# Altium PCB otis_v1.PcbDoc
Units mil, origin at the board's own origin, x right, y up, seen from the top; angles counter-clockwise.
Board outline 1739 x 885 mil, 2 copper layers (Top Layer, Bottom Layer); 13 components, 21 nets, 88 pads, 13 vias.
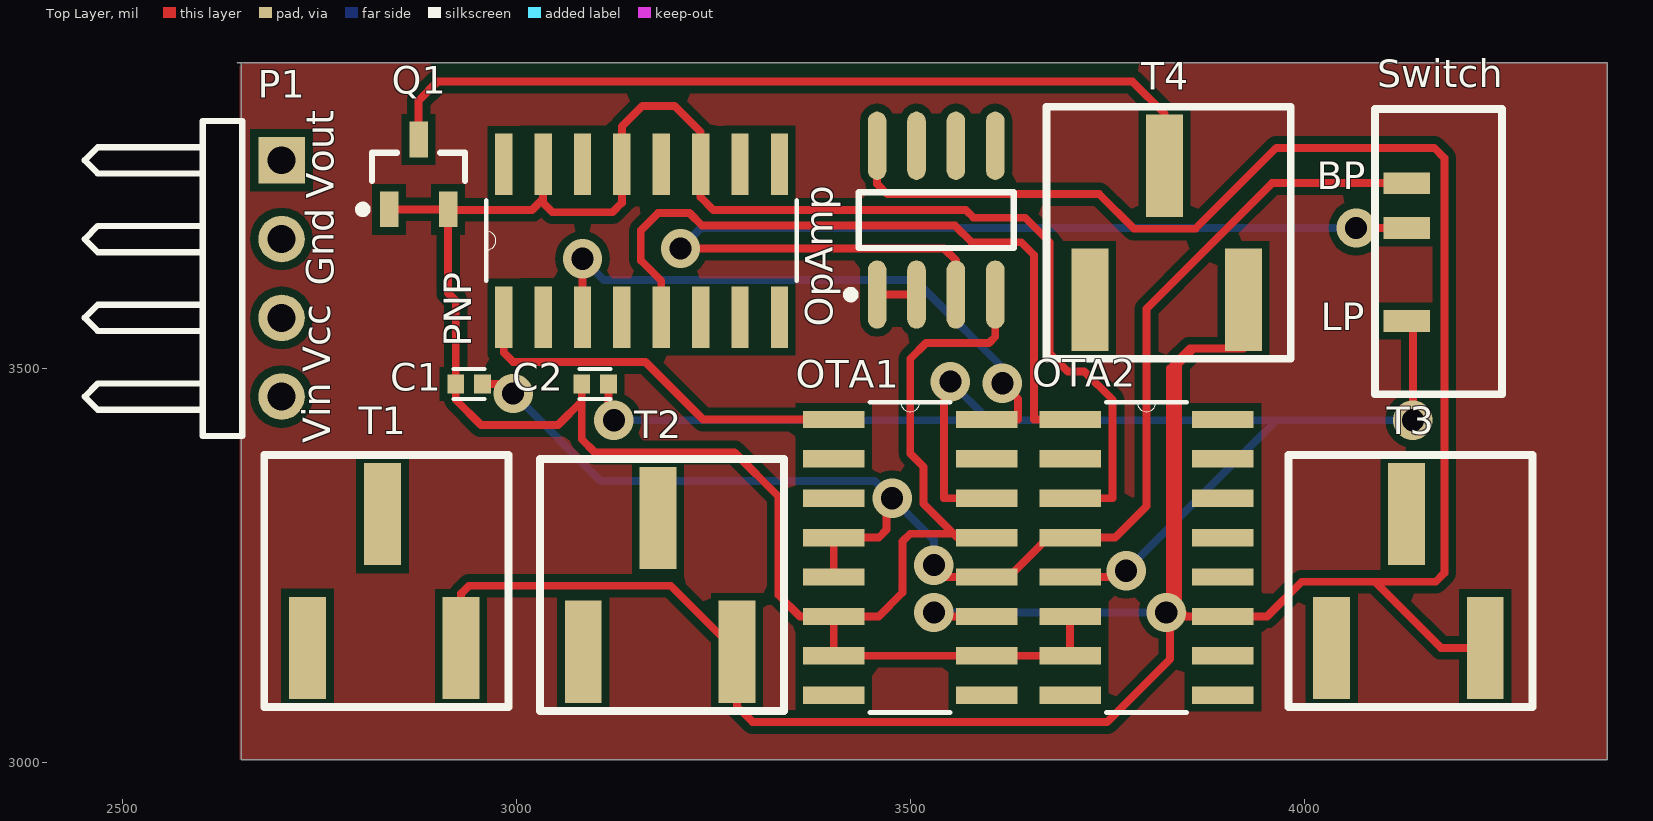
[diagram p0: Top Layer view]
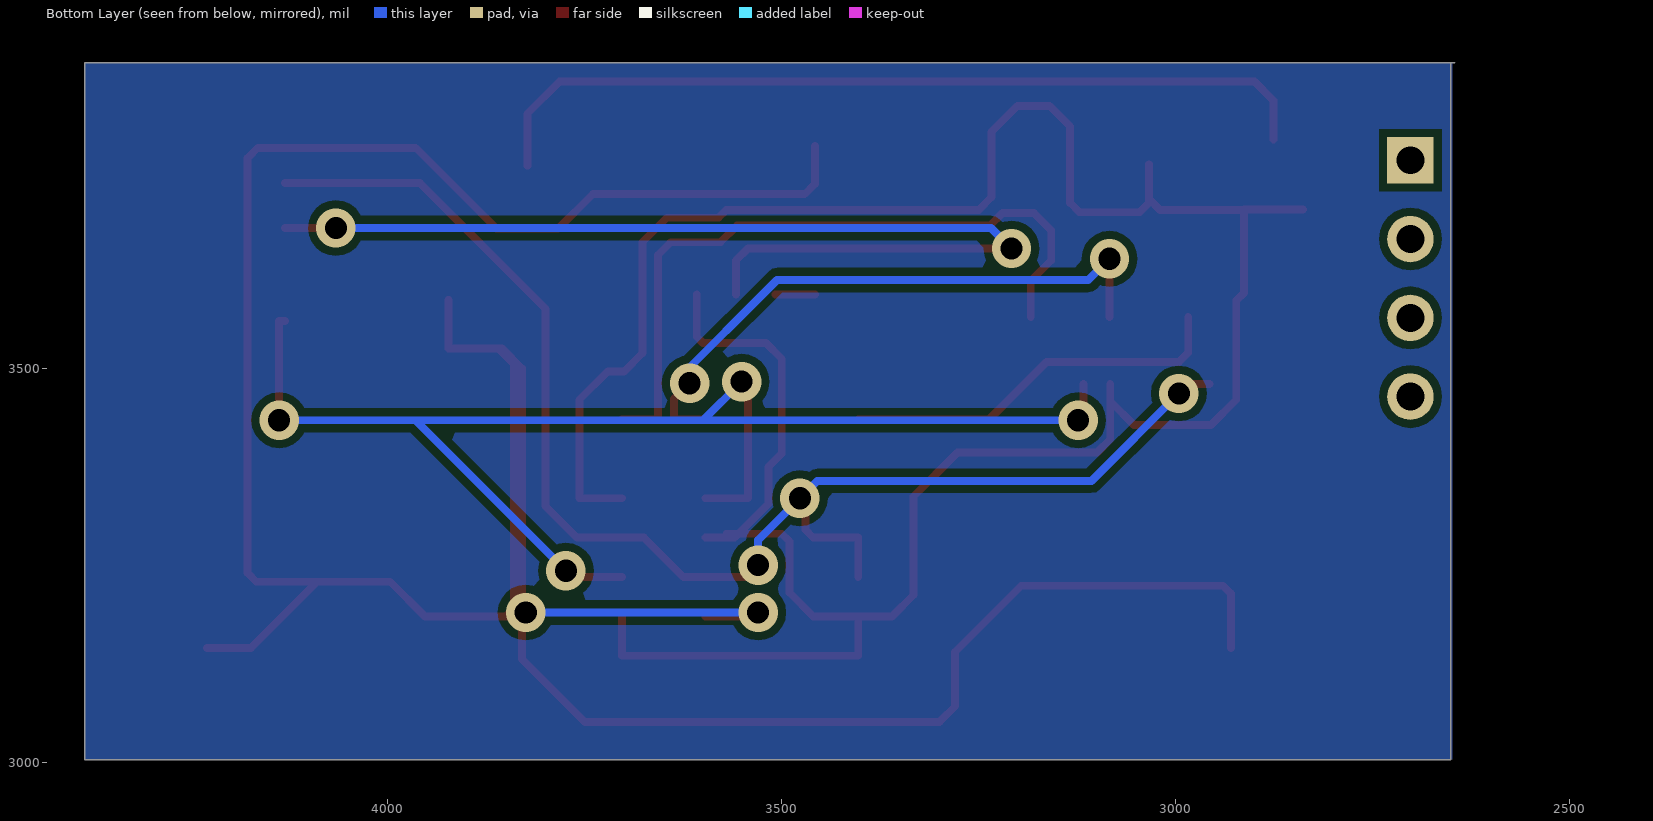
[diagram p1: Bottom Layer view, seen from below]

## Layer stack, top to bottom
Top Solder: solder mask 0.4, Solder Resist, Dk 3.5
Top Layer: signal copper 1.4
Dielectric1: dielectric 12.6, FR-4, Dk 4.8
Bottom Layer: signal copper 1.4
Bottom Solder: solder mask 0.4, Solder Resist, Dk 3.5

## Board outline
2646,3888 4385,3888 4385,3003 2651,3003 2651,3887

## Design rules (kind name [scope] priority, off if disabled: settings)
Clearance [All] p1: gap=10
FabricationTestPointUsage TestPointUsage [All] p1: valid=0 allowmultiple=FALSE
FabricationTestpoint Testpoint [All] p1: side=3 testpointundercomponent=TRUE minsize=40 maxsize=100 preferedsize=60 minholesize=0 maxholesize=40 preferedholesize=32 testpointgrid=1 allowsidetop=TRUE allowsidebottom=TRUE usegrid=TRUE gridtolerance=0.01
PolygonConnect [All] p1: connectstyle=Relief reliefconductorwidth=10 reliefentries=4 polygonreliefangle="90 Angle" airgapwidth=10
RoutingVias [All] p1: holewidth=28 width=50 viastyle="Through Hole" minholewidth=28 minwidth=50 maxholewidth=28 maxwidth=50
SolderMaskExpansion [All] p1: expansion=4
UnpouredPolygon [All] p1: allowunpoured=FALSE
Width [All] p1: maxlimit=15 minlimit=10 preferedwidth=10 minimp=50.000000 maximp=50.000000 favimp=50.000000
27 further rules are at their usual default settings.

## Components (designator, comment, footprint, x,y, rotation, side; value= is the part's Value field where it differs from the comment)
C1 "100pF" _C*CAPC1005X55N_CC0402C100K5GACAUTO_CPrimary_C 2940,3480 r0 top
C2 "100pF" _C*CAPC1005X55N_CC0402C100K5GACAUTO_CPrimary_C 3100,3480 r0 top
OpAmp "LF153D" SO8_N 3533,3688 r90 top (schematic designator U4)
OTA1 "" LM13700LM13700MLM13700LM13700MLM13700PrimaryLM13700 3500,3260 r0 top (schematic designator U1)
OTA2 "" LM13700LM13700MLM13700LM13700MLM13700PrimaryLM13700 3800,3260 r0 top (schematic designator U2)
P1 "Header 4H" HDR1X4H 2702,3764 r270 top
PNP "MMPQ3906" LM13700LM13700MLM13700LM13700MLM13700PrimaryLM13700 3159,3662 r90 top (schematic designator U3)
Q1 "PNP" SOT-23B_N 2876,3746 r90 top
Switch "" PCBComponent_1#1 14303,18890 r90 top (schematic designator S1)
T1 "" PCBComponent_1#2 17200,31220 r0 top
T2 "" PCBComponent_1#2 17550,31215 r0 top
T3 "" PCBComponent_1#2 18500,31220 r0 top
T4 "" PCBComponent_1#2 18193,31662 r0 top

## Footprints (in the part's own frame and the unit in brackets; to place one, negate y for a bottom-side part, rotate by r counter-clockwise, add the part's x,y. Pads: shape width x height; smd on the part's side, far side on the other; paste and mask are expansions set on the pad)
_C*CAPC1005X55N_CC0402C100K5GACAUTO_CPrimary_C [mm]
  rect 0.54x0.6 smd: 1(-0.43,0) 2(0.43,0)
  silkscreen extent -0.5,-0.48 0.5,0.48
HDR1X4H [mm] "Connector; Header; 4 Position; Right Angle"
  rect 1.5x1.5 hole 0.9: 1(0,0)
  round 1.5 hole 0.9: 2(2.54,0) 3(5.08,0) 4(7.62,0)
  silkscreen extent -1.27,-6.35 8.89,-1.27
LM13700LM13700MLM13700LM13700MLM13700PrimaryLM13700 [mil]
  rect 78x22 smd: 1(-97,175) 2(-97,125) 3(-97,75) 4(-97,25) 5(-97,-25) 6(-97,-75) 7(-97,-125) 8(-97,-175) 9(97,-175) 10(97,-125) 11(97,-75) 12(97,-25) 13(97,25) 14(97,75) 15(97,125) 16(97,175)
  silkscreen extent -51,-197 51,197
PCBComponent_1#1 [mm]
  rect 0.7x1.5 smd: 1(-389.382,258.381) 2(-386.385,258.381) 3(-384.937,258.381)
  round 0.9 on Top Solder: 8(-388.62,256.667) 9(-385.623,256.667)
  rect 1x0.8 on Top Paste: MP1(-390.728,257.581) MP2(-390.728,256.108) MP3(-383.515,257.581) MP4(-383.515,256.108)
  silkscreen extent -391.74,255.32 -382.55,259.41
PCBComponent_1#2 [mm]
  rect 1.19x3.3 smd: 1(-364.998,-708.787) 2(-367.411,-713.105) 3(-362.458,-713.105)
  silkscreen extent -368.81,-715.01 -360.93,-706.88
SO8_N [mm] "SOIC, 8-Leads, Body 4.9x3.9mm, Pitch 1.27mm, IPC Medium Density"
  oval 2.2x0.6 smd: 1(-2.4,1.905) 2(-2.4,0.635) 3(-2.4,-0.635) 4(-2.4,-1.905) 5(2.4,-1.905) 6(2.4,-0.635) 7(2.4,0.635) 8(2.4,1.905)
  silkscreen extent -2.52,-2.5 0.9,2.88, body extent -1.95,-2.45 1.95,2.45, height 1.75
SOT-23B_N [mm] "SOT23, 3-Leads, Body 2.9x1.3mm, Pitch 0.95mm, Lead Span 2.4mm, IPC Medium Density"
  rect 1.15x0.6 smd: 1(-1.125,0.95) 2(-1.125,-0.95) 3(1.125,0)
  silkscreen extent -1.25,-1.5 0.7,1.92, body extent -0.7,-1.5 0.7,1.5, height 1.14

## Part data
C1 C2: library part C0402C100K5GACAUTO, "CAPACITOR CERAMIC 10 PF 10% TOL 50V C0G 0402"
OpAmp: "Wide-Bandwidth Dual J-FET Operational Amplifier"
OTA1 OTA2 Switch T1 T2 T3 T4: library part Component_1
P1: "Header, 4-Pin, Right Angle"
PNP: library part LM13700M, "Dual Operational Transconductance Amplifier with Linearizing Diodes and Buffers 16-SOIC 0 to 70"
Q1: "PNP Bipolar Transistor"

## Via types
v1: diameter 50, hole 28, Top Layer to Bottom Layer, 13 vias

## Nets (pads, with @x,y where several pads share a name; then routed paths per layer and width w, separated by ;. In a path a pad name is that pad's centre, name@x,y a point inside that pad or via, vN(x,y) a via of type N, cw(c..) or ccw(c..) an arc to the next point about the centre after c; other vN are vias at no path point)
BP: C1.2 OTA1.4 OTA1.5 OTA1.12 OTA2.4 Switch.3 | length 1811.8
  Top Layer w10: C1.2 2984,3480 v1(2996,3468) ; OTA1.5 OTA1.4 3460,3285 3470,3295 3470,3328 v1(3477,3335) ; v1(3530,3250) 3545,3235 OTA1.12 3625,3235 3675,3285 OTA2.4 3760,3285 3800,3325 3800,3575.61 3959.39,3735 Switch.3
  Bottom Layer w10: v1(2996,3468) 3107,3357 3455,3357 v1(3477,3335) 3530,3282 v1(3530,3250)
GND: C1.1 C2.1 OpAmp.4 OTA1.6 OTA1.7 OTA1.10 OTA1.13 OTA2.3 OTA2.6 OTA2.7 PNP.11 PNP.13 PNP.15 Q1.1 Q1.2 | length 3659.1
  Top Layer w10: Q1.1 Q1.2 Q1.2@2913.4,3701 ; PNP.15 3034,3715 ; C2.1 3083.07,3458.21 ; OTA1.13 OTA1.13@3570,3285 ; OpAmp.4 3608,3540 3600.09,3532.09 3520,3532.09 3500,3512.09 3500,3391.8 3517,3374.8 3517,3328 3555,3290 ; OTA2.6 OTA2.7 OTA1.10 OTA1.7 OTA1.6 ; OTA2.3 3757,3335 3757,3460 3721,3496 3700,3496 3677,3519 3677,3660 3646,3691 3580.58,3691 3570.58,3701 3250,3701 3234,3717 PNP.11 3234,3800 3201,3833 3160,3833 3134,3807 PNP.13 3134,3710 3122,3698 3046,3698 3034,3710 3034,3715 ; Q1.2@2913.4,3701 3020,3701 3034,3715 ; Q1.2@2913.4,3701 2913.4,3595.67 2923.07,3586 C1.1 2923.07,3460 2955.07,3428 3052.86,3428 3083.07,3458.21 ; 3083.07,3458.21 3083.07,3409.95 3100,3393.02 3276.98,3393.02 3333,3337 3333,3212 3360,3185 OTA1.6 ; OTA1.6 3460,3185 3490,3215 3490,3280 3500,3290 3555,3290 ; 3555,3290 3570,3290 OTA1.13@3570,3285 ; 3555,3290 3560,3285 OTA1.13@3570,3285
LP: C2.2 OTA1.14 OTA2.5 Switch.1 | length 1820.2
  Top Layer w10: C2.2 3116.93,3441 v1(3123.93,3434) ; v1(3551,3483) 3543,3475 3543,3335 OTA1.14 ; OTA2.5 3774,3235 v1(3774,3243) ; Switch.1 4138,3560 v1(4138,3434)
  Bottom Layer w10: v1(3123.93,3434) 3600,3434 ; v1(3551,3483) 3600,3434 ; v1(3774,3243) 3965,3434 ; v1(4138,3434) 3965,3434 ; 3600,3434 3965,3434
NetOpAmp_1: OpAmp.1 OpAmp.2 | length 50
  Top Layer w10: OpAmp.1 OpAmp.2
NetOpAmp_3: OpAmp.3 Switch.2 | length 1332.2
  Top Layer w10: v1(3208.36,3652) 3543,3652 3558,3637 OpAmp.3 ; v1(4066,3678) Switch.2
  Bottom Layer w10: v1(3208.36,3652) 3234.36,3678 v1(4066,3678)
NetOTA1: 
NetOTA1_1: OTA1.1 PNP.1 | length 499.2
  Top Layer w10: PNP.1 2984,3520 2996,3508 3164,3508 3237,3435 OTA1.1
NetOTA1_16: OTA1.16 PNP.3 | length 806.7
  Top Layer w10: PNP.3 v1(3084,3639) ; OTA1.16 3637,3435 3637,3461 v1(3617,3481)
  Bottom Layer w10: v1(3084,3639) 3111,3612 3506,3612 3637,3481 v1(3617,3481)
NetOTA2: 
NetOTA2_1: OTA2.1 PNP.5 | length 905.8
  Top Layer w10: PNP.5 3184,3611 3158,3637 3158,3675 3180,3697 3219.92,3697 3235.92,3681 3557,3681 3578,3660 3641,3660 3657,3644 3657,3435 OTA2.1
NetOTA3: 
NetPNP_12: PNP.12
NetPNP_14: PNP.14
NetPNP_16: PNP.16
NetQ1_1: 
NetQ1_3: Q1.3 T4.1 | length 1089.6
  Top Layer w10: Q1.3 2876,3840 2900,3864 3782,3864 3823,3823 T4.1
NetQ2_3: T1.1
NetQ3_3: T2.1
NetQ4_3: T3.1
VCC: OpAmp.8 OTA1.11 OTA2.11 T1.3 T2.3 T3.3 T4.3 | length 4288.8
  Top Layer w10: T1.3 2930,3214 2940,3224 3196,3224 T2.3 3280,3071 3300,3051 3750,3051 3830,3131 v1@3830,3185 ; OpAmp.8 3458,3734 3471,3721 3740.04,3721 3784,3677.04 3862,3677.04 3964.74,3779.78 4165.22,3779.78 4178,3767 4178,3240 4167,3229 4090,3229 ; v1(3530,3190) 3535,3185 OTA1.11 ; v1(3825,3190) v1@3830,3185 ; T4.3 3923,3525 3860,3525 ; T3.3 4174,3145 4090,3229 ; v1@3830,3185 3850,3185 ; v1@3830,3185 3830,3500 3855,3525 3860,3525 ; 3850,3185 OTA2.11 3953,3185 3997,3229 4090,3229 ; 3850,3185 3840,3195 3840,3505 3860,3525
  Bottom Layer w10: v1(3530,3190) v1(3825,3190)
VIN: OTA1.3
pads on no net: OpAmp.5 OpAmp.6 OpAmp.7 OTA1.2 OTA1.8 OTA1.9 OTA1.15 OTA2.2 OTA2.8 OTA2.9 OTA2.10 OTA2.12 OTA2.13 OTA2.14 OTA2.15 OTA2.16 P1.1 P1.2 P1.3 P1.4 PNP.2 PNP.4 PNP.6 PNP.7 PNP.8 PNP.9 PNP.10 Switch.8 Switch.9 Switch.MP1 Switch.MP2 Switch.MP3 Switch.MP4 T1.2 T2.2 T3.2 T4.2

## Polygon pours and split planes (outlines as drawn)
no net on Top Layer "gnd" (solid, pour order 1000): 2654,3887 4385,3887 4385,3004 2649,3004 2649,3888
no net on Bottom Layer "gnd" (solid, pour order 1001): 2649,3887 4385,3887 4385,3004 2649,3004

## Silkscreen, mask and mechanical layers (free items; w line width, h text height)
Top Overlay:
  text "BP" at 4016,3716 h60
  text "Vout" at 2780,3715 h60 r90
  text "Gnd" at 2780,3605 h60 r90
  text "LP" at 4021,3537 h60
  text "Vcc" at 2775,3495 h60 r90
  text "Vin" at 2775,3405 h60 r90